# EAGLE board Pro_RF-Panel (EAGLE 9.2.0), part 1 of 3
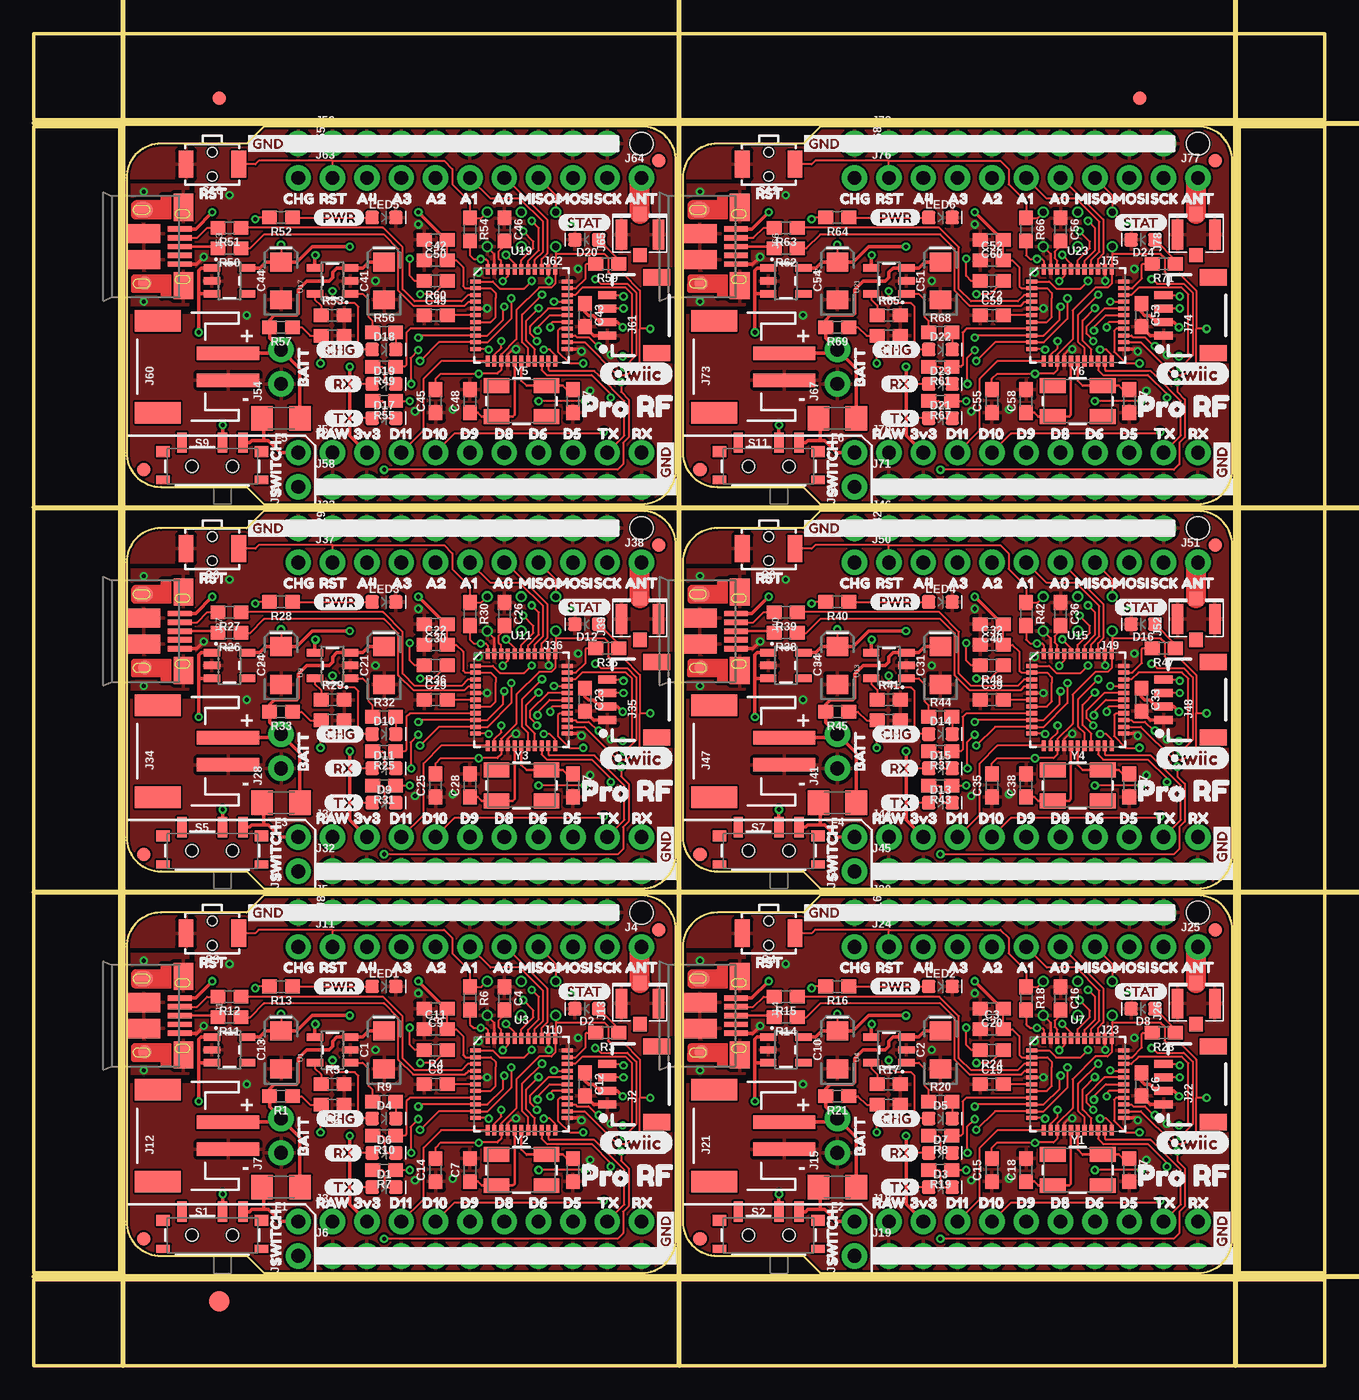
[diagram p0: board, top side]
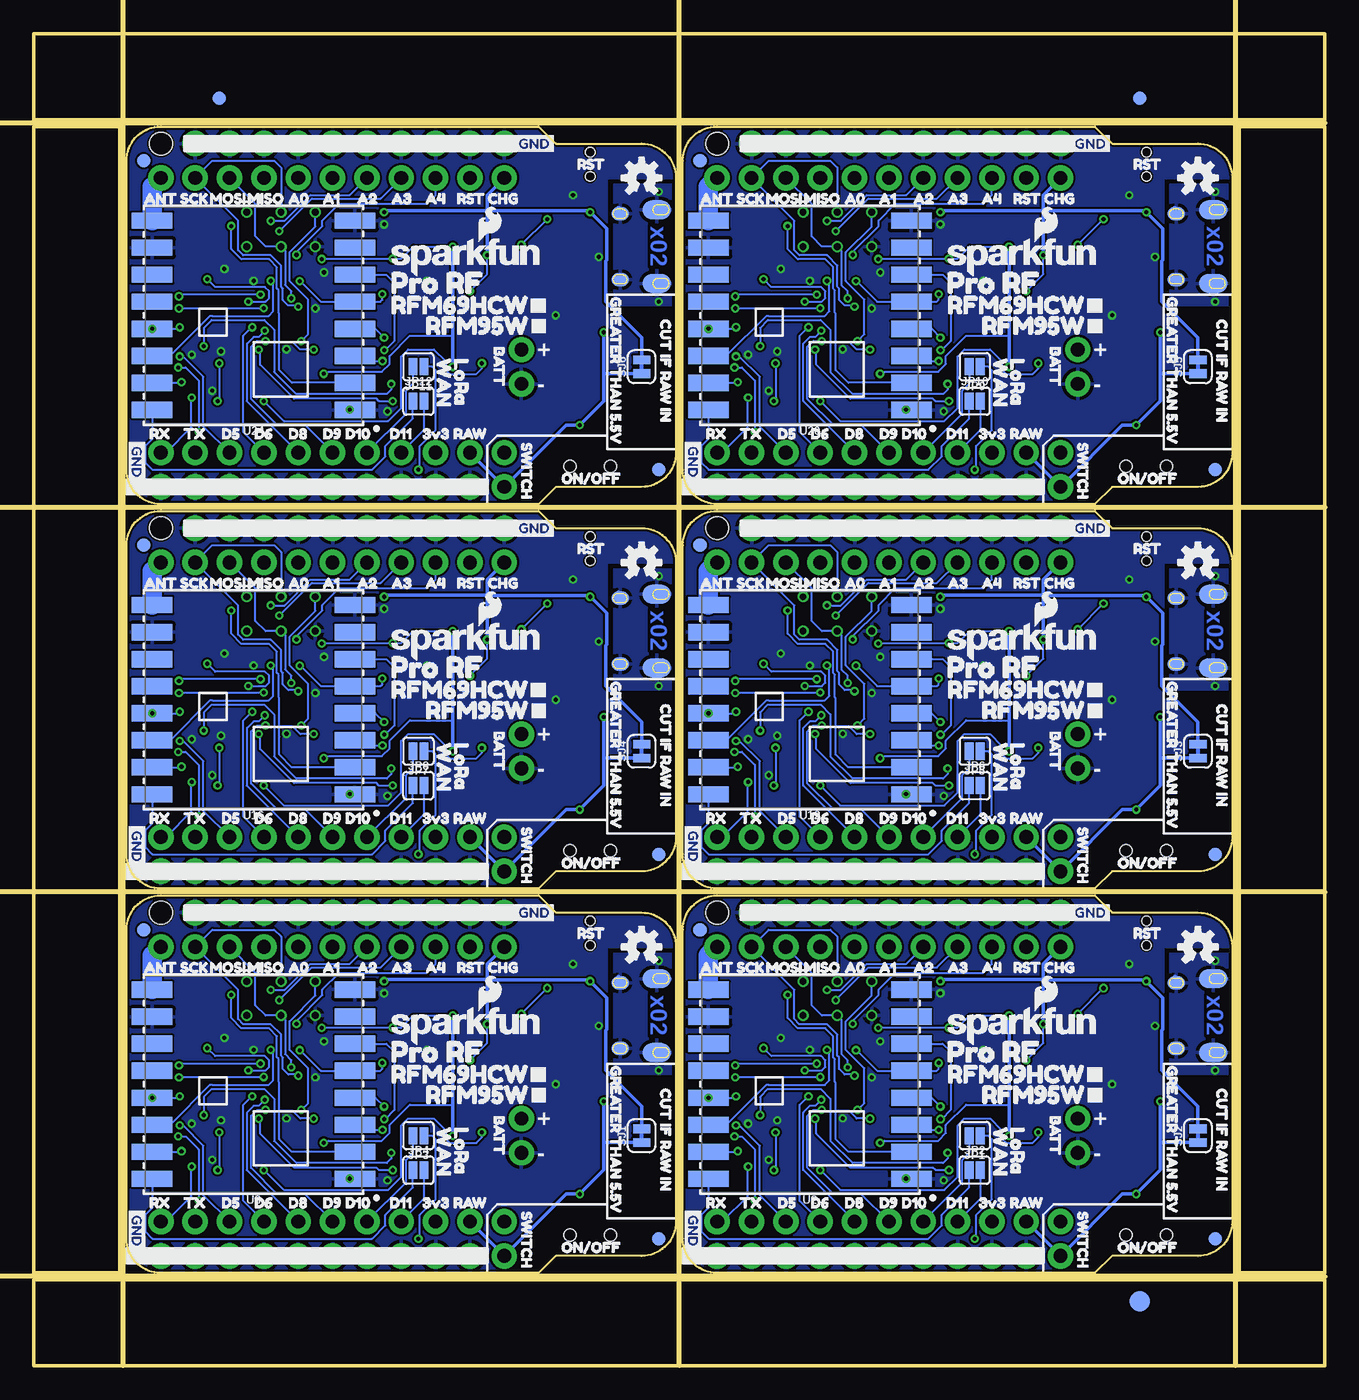
[diagram p1: board, bottom side, seen from below]

Size 95.5 x 98.55 mm. Coordinates in mm from the lower left corner, seen from the top.
Outline: 15.75,8.13 17.02,6.86 44.96,6.86 arc90 47.5,9.4 47.5,32.26 arc90 44.96,34.8 17.02,34.8 15.75,33.53 9.4,33.53 arc90 6.86,30.99 6.86,10.67 arc90 9.4,8.13 15.75,8.13
Outline: 56.9,8.13 58.17,6.86 86.11,6.86 arc90 88.65,9.4 88.65,32.26 arc90 86.11,34.8 58.17,34.8 56.9,33.53 50.55,33.53 arc90 48.01,30.99 48.01,10.67 arc90 50.55,8.13 56.9,8.13
Outline: 15.75,36.58 17.02,35.31 44.96,35.31 arc90 47.5,37.85 47.5,60.71 arc90 44.96,63.25 17.02,63.25 15.75,61.98 9.4,61.98 arc90 6.86,59.44 6.86,39.12 arc90 9.4,36.58 15.75,36.58
Outline: 56.9,36.58 58.17,35.31 86.11,35.31 arc90 88.65,37.85 88.65,60.71 arc90 86.11,63.25 58.17,63.25 56.9,61.98 50.55,61.98 arc90 48.01,59.44 48.01,39.12 arc90 50.55,36.58 56.9,36.58
Outline: 15.75,65.02 17.02,63.75 44.96,63.75 arc90 47.5,66.29 47.5,89.15 arc90 44.96,91.69 17.02,91.69 15.75,90.42 9.4,90.42 arc90 6.86,87.88 6.86,67.56 arc90 9.4,65.02 15.75,65.02
Outline: 56.9,65.02 58.17,63.75 86.11,63.75 arc90 88.65,66.29 88.65,89.15 arc90 86.11,91.69 58.17,91.69 56.9,90.42 50.55,90.42 arc90 48.01,87.88 48.01,67.56 arc90 50.55,65.02 56.9,65.02
Outline: 0,6.35 95.5,6.35 95.5,0 0,0 0,6.35
Outline: 89.15,91.69 95.5,91.69 95.5,6.86 89.15,6.86 89.15,91.69
Outline: 0,98.55 95.5,98.55 95.5,92.2 0,92.2 0,98.55
Outline: 0,91.69 6.35,91.69 6.35,6.86 0,6.86 0,91.69
Copper layers (1*16): Top 0.035mm / dielectric 1.5mm / Bottom 0.035mm
Design rules "SparkFun-2-layer-PCBWay-LIMIT": minimum track width 6mil, minimum drill 0.3mm, track to track 6mil, track to pad 6mil, pad to pad 6mil, via to via 6mil, smd to smd 6mil, copper to edge 6mil, drill to drill 6mil, minimum pad ring 6mil, minimum via ring 6mil, stop-mask expansion 4mil, vias tented up to drill 25mil, thermal gap 10mil
Holes 1.7 mm at 44.96,33.53 86.11,33.53 44.96,61.98 86.11,61.98 44.96,90.42 86.11,90.42
Milling: 7 lines

## Footprints (pad centres in the part's own frame; a part is rotated, then mirrored left to right if it is on the bottom)
EIA3216 = smd 1.4 x 1.6: + 1.4,0; - -1.4,0
0603 = smd 1.1 x 1: 1 -0.85,0; 2 0.85,0
LED-0603 = smd 1 x 1: A -0.877,0; C 0.877,0
FIDUCIAL-1X2 = smd 1 x 1: 1 0,0
FIDUCIAL-1.5X3 = smd 1.5 x 1.5: 1 0,0
1206 = smd 1.6 x 1.8: 1 -1.4,0; 2 1.4,0
USB-MICROB-PTH-MILL = smd 0.4 x 1.75: D+ 0,0; D- -0.65,0; GND 1.3,0; ID 0.65,0; VBUS -1.3,0 | smd 2 x 1.46: SHIELD -2.9,0.275; SHIELD2 2.9,0.275 | smd 1.425 x 2.5: SHIELD3 -0.963,-2.675; SHIELD4 0.963,-2.675 | smd 1.4 x 2.1 bottom: SHIELD5 -2.731,-2.531; SHIELD7 2.729,-2.531 | smd 1 x 1: SHIELD6 2.7,-2.575 | smd 1.1 x 1.5: SHIELD8 -2.731,-2.731 | smd 1 x 1.3 bottom: SHIELD9 -2.43,0.195; SHIELD10 2.43,0.195
1X04_1MM_RA = smd 0.6 x 1.35: 1 -1.5,0; 2 -0.5,0; 3 0.5,0; 4 1.5,0 | smd 1.2 x 2: NC1 2.8,-3.675; NC2 -2.8,-3.675
1X10_NO_SILK = drill 1.016 pad 1.88: 1 0,0; 2 2.54,0; 3 5.08,0; 4 7.62,0; 5 10.16,0; 6 12.7,0; 7 15.24,0; 8 17.78,0; 9 20.32,0; 10 22.86,0
1X01_NO_SILK = drill 1.016 pad 1.88: 1 0,0
1X09_NO_SILK = drill 1.016 pad 1.88: 1 0,0; 2 2.54,0; 3 5.08,0; 4 7.62,0; 5 10.16,0; 6 12.7,0; 7 15.24,0; 8 17.78,0; 9 20.32,0
1X02_NO_SILK = drill 1.016 pad 1.88: 1 0,0; 2 2.54,0
2X3_TEST_POINTS = drill 0.508: 1 -2.54,-1.27; 2 -2.54,1.27; 3 0,-1.27; 4 0,1.27; 5 2.54,-1.27; 6 2.54,1.27
JST-2-SMD = smd 1 x 4.6: 1 -1,-3.7; 2 1,-3.7 | smd 1.6 x 3.4: NC1 -3.4,1.5; NC2 3.4,1.5
U.FL = smd 2.2 x 0.85: 1 0,1.375; 2 0,-1.375 | smd 1.05 x 1: FEED 1.525,0; NC -1.525,0
SMT-JUMPER_2_NO_SILK = smd 0.635 x 1.27: 1 -0.406,0; 2 0.406,0
SWITCH_SPST_SMD_A = smd 0.7 x 1.5: 1 -2.25,-1.75; 2 -0.75,-1.75; 3 2.25,-1.75 | smd 1 x 0.6: GND1 -3.65,1; GND3 3.65,1 | smd 1 x 0.8: GND2 -3.65,-1.1; GND4 3.65,-1.1 | hole 0.9: -1.5,0; 1.5,0
TACTILE_SWITCH_SMD_RIGHT_ANGLE = smd 1.1 x 2: 1 -1.95,0; 2 1.95,0 | hole 0.7: 0,0.9; 0,-0.9
SMT-JUMPER_2_NC_TRACE_SILK = smd 0.635 x 1.27: 1 -0.508,0; 2 0.508,0
SOT23-5 = smd 0.55 x 1.2: 1 -0.95,-1.3; 2 0,-1.3; 3 0.95,-1.3; 4 0.95,1.3; 5 -0.95,1.3
RFM69HCW-XXXS2 = smd 3 x 1.2: 1 -7.5,7; 2 -7.5,5; 3 -7.5,3; 4 -7.5,1; 5 -7.5,-1; 6 -7.5,-3; 7 -7.5,-5; 8 -7.5,-7; 9 7.5,-7; 10 7.5,-5; 11 7.5,-3; 12 7.5,-1; 13 7.5,1; 14 7.5,3; 15 7.5,5; 16 7.5,7
QFN-44-NOPAD = smd 0.8 x 0.3: 1 -3.4,2.5; 2 -3.4,2; 3 -3.4,1.5; 4 -3.4,1; 5 -3.4,0.5; 6 -3.4,0; 7 -3.4,-0.5; 8 -3.4,-1; 9 -3.4,-1.5; 10 -3.4,-2; 11 -3.4,-2.5; 23 3.4,-2.5; 24 3.4,-2; 25 3.4,-1.5; 26 3.4,-1; 27 3.4,-0.5; 28 3.4,0; 29 3.4,0.5; 30 3.4,1; 31 3.4,1.5; 32 3.4,2; 33 3.4,2.5 | smd 0.3 x 0.8: 12 -2.5,-3.4; 13 -2,-3.4; 14 -1.5,-3.4; 15 -1,-3.4; 16 -0.5,-3.4; 17 0,-3.4; 18 0.5,-3.4; 19 1,-3.4; 20 1.5,-3.4; 21 2,-3.4; 22 2.5,-3.4; 34 2.5,3.4; 35 2,3.4; 36 1.5,3.4; 37 1,3.4; 38 0.5,3.4; 39 0,3.4; 40 -0.5,3.4; 41 -1,3.4; 42 -1.5,3.4; 43 -2,3.4; 44 -2.5,3.4
CRYSTAL-SMD-5X3.2-4PAD = smd 1.9 x 1.1: 1 -1.85,-1.15; 2 1.85,-1.15; 3 1.85,1.15; 4 -1.85,1.15

## Placement (x,y rotation side)
C1  10uF  [EIA3216]  25.91,23.37 90 top
C2  10uF  [EIA3216]  67.06,23.37 90 top
C3  0.1uF  [0603]  70.87,24.89 0 top
C4  0.1uF  [0603]  34.8,27.18 270 top
C5  22pF  [0603]  39.88,14.48 270 top
C6  1.0uF  [0603]  81.92,20.83 270 top
C7  22pF  [0603]  32.26,14.48 90 top
C8  1.0uF  [0603]  29.72,20.83 0 top
C9  4.7uF  [0603]  29.72,26.42 180 top
C10  10uF  [EIA3216]  59.44,23.37 90 top
C11  0.1uF  [0603]  29.72,24.89 0 top
C12  1.0uF  [0603]  40.77,20.83 270 top
C13  10uF  [EIA3216]  18.29,23.37 90 top
C14  0.1uF  [0603]  29.72,14.48 90 top
C15  0.1uF  [0603]  70.87,14.48 90 top
C16  0.1uF  [0603]  75.95,27.18 270 top
C17  22pF  [0603]  81.03,14.48 270 top
C18  22pF  [0603]  73.41,14.48 90 top
C19  1.0uF  [0603]  70.87,20.83 0 top
C20  4.7uF  [0603]  70.87,26.42 180 top
C21  10uF  [EIA3216]  25.91,51.82 90 top
C22  0.1uF  [0603]  29.72,53.34 0 top
C23  1.0uF  [0603]  40.77,49.28 270 top
C24  10uF  [EIA3216]  18.29,51.82 90 top
C25  0.1uF  [0603]  29.72,42.93 90 top
C26  0.1uF  [0603]  34.8,55.63 270 top
C27  22pF  [0603]  39.88,42.93 270 top
C28  22pF  [0603]  32.26,42.93 90 top
C29  1.0uF  [0603]  29.72,49.28 0 top
C30  4.7uF  [0603]  29.72,54.86 180 top
C31  10uF  [EIA3216]  67.06,51.82 90 top
C32  0.1uF  [0603]  70.87,53.34 0 top
C33  1.0uF  [0603]  81.92,49.28 270 top
C34  10uF  [EIA3216]  59.44,51.82 90 top
C35  0.1uF  [0603]  70.87,42.93 90 top
C36  0.1uF  [0603]  75.95,55.63 270 top
C37  22pF  [0603]  81.03,42.93 270 top
C38  22pF  [0603]  73.41,42.93 90 top
C39  1.0uF  [0603]  70.87,49.28 0 top
C40  4.7uF  [0603]  70.87,54.86 180 top
C41  10uF  [EIA3216]  25.91,80.26 90 top
C42  0.1uF  [0603]  29.72,81.79 0 top
C43  1.0uF  [0603]  40.77,77.72 270 top
C44  10uF  [EIA3216]  18.29,80.26 90 top
C45  0.1uF  [0603]  29.72,71.37 90 top
C46  0.1uF  [0603]  34.8,84.07 270 top
C47  22pF  [0603]  39.88,71.37 270 top
C48  22pF  [0603]  32.26,71.37 90 top
C49  1.0uF  [0603]  29.72,77.72 0 top
C50  4.7uF  [0603]  29.72,83.31 180 top
C51  10uF  [EIA3216]  67.06,80.26 90 top
C52  0.1uF  [0603]  70.87,81.79 0 top
C53  1.0uF  [0603]  81.92,77.72 270 top
C54  10uF  [EIA3216]  59.44,80.26 90 top
C55  0.1uF  [0603]  70.87,71.37 90 top
C56  0.1uF  [0603]  75.95,84.07 270 top
C57  22pF  [0603]  81.03,71.37 270 top
C58  22pF  [0603]  73.41,71.37 90 top
C59  1.0uF  [0603]  70.87,77.72 0 top
C60  4.7uF  [0603]  70.87,83.31 180 top
D1  Green  [LED-0603]  25.91,13.21 0 top
D2  BLUE  [LED-0603]  40.89,26.42 180 top
D3  Green  [LED-0603]  67.06,13.21 0 top
D4  Yellow  [LED-0603]  25.91,18.29 0 top
D5  Yellow  [LED-0603]  67.06,18.29 0 top
D6  Yellow  [LED-0603]  25.91,15.75 0 top
D7  Yellow  [LED-0603]  67.06,15.75 0 top
D8  BLUE  [LED-0603]  82.04,26.42 180 top
D9  Green  [LED-0603]  25.91,41.66 0 top
D10  Yellow  [LED-0603]  25.91,46.74 0 top
D11  Yellow  [LED-0603]  25.91,44.2 0 top
D12  BLUE  [LED-0603]  40.89,54.86 180 top
D13  Green  [LED-0603]  67.06,41.66 0 top
D14  Yellow  [LED-0603]  67.06,46.74 0 top
D15  Yellow  [LED-0603]  67.06,44.2 0 top
D16  BLUE  [LED-0603]  82.04,54.86 180 top
D17  Green  [LED-0603]  25.91,70.1 0 top
D18  Yellow  [LED-0603]  25.91,75.18 0 top
D19  Yellow  [LED-0603]  25.91,72.64 0 top
D20  BLUE  [LED-0603]  40.89,83.31 180 top
D21  Green  [LED-0603]  67.06,70.1 0 top
D22  Yellow  [LED-0603]  67.06,75.18 0 top
D23  Yellow  [LED-0603]  67.06,72.64 0 top
D24  BLUE  [LED-0603]  82.04,83.31 180 top
E$1  [FIDUCIAL-1X2]  13.72,93.79 0 top
E$2  [FIDUCIAL-1X2]  13.72,93.79 0 bottom
E$3  [FIDUCIAL-1X2]  81.79,93.79 0 top
E$4  [FIDUCIAL-1X2]  81.79,93.79 0 bottom
E$5  [FIDUCIAL-1.5X3]  13.72,4.76 0 top
E$6  [FIDUCIAL-1.5X3]  13.72,4.76 0 bottom
F1  6V/0.5A  [1206]  18.29,13.21 180 top
F2  6V/0.5A  [1206]  59.44,13.21 180 top
F3  6V/0.5A  [1206]  18.29,41.66 180 top
F4  6V/0.5A  [1206]  59.44,41.66 180 top
F5  6V/0.5A  [1206]  18.29,70.1 180 top
F6  6V/0.5A  [1206]  59.44,70.1 180 top
FD1  FIDUCIAL1X2  [FIDUCIAL-1X2]  8.13,9.4 0 bottom
FD2  FIDUCIAL1X2  [FIDUCIAL-1X2]  46.23,32.26 0 bottom
FD3  FIDUCIAL1X2  [FIDUCIAL-1X2]  8.13,9.4 0 top
FD4  FIDUCIAL1X2  [FIDUCIAL-1X2]  46.23,32.26 0 top
FD5  FIDUCIAL1X2  [FIDUCIAL-1X2]  49.28,9.4 0 bottom
FD6  FIDUCIAL1X2  [FIDUCIAL-1X2]  87.38,32.26 0 bottom
FD7  FIDUCIAL1X2  [FIDUCIAL-1X2]  49.28,9.4 0 top
FD8  FIDUCIAL1X2  [FIDUCIAL-1X2]  87.38,32.26 0 top
FD9  FIDUCIAL1X2  [FIDUCIAL-1X2]  8.13,37.85 0 bottom
FD10  FIDUCIAL1X2  [FIDUCIAL-1X2]  46.23,60.71 0 bottom
FD11  FIDUCIAL1X2  [FIDUCIAL-1X2]  8.13,37.85 0 top
FD12  FIDUCIAL1X2  [FIDUCIAL-1X2]  46.23,60.71 0 top
FD13  FIDUCIAL1X2  [FIDUCIAL-1X2]  49.28,37.85 0 bottom
FD14  FIDUCIAL1X2  [FIDUCIAL-1X2]  87.38,60.71 0 bottom
FD15  FIDUCIAL1X2  [FIDUCIAL-1X2]  49.28,37.85 0 top
FD16  FIDUCIAL1X2  [FIDUCIAL-1X2]  87.38,60.71 0 top
FD17  FIDUCIAL1X2  [FIDUCIAL-1X2]  8.13,66.29 0 bottom
FD18  FIDUCIAL1X2  [FIDUCIAL-1X2]  46.23,89.15 0 bottom
FD19  FIDUCIAL1X2  [FIDUCIAL-1X2]  8.13,66.29 0 top
FD20  FIDUCIAL1X2  [FIDUCIAL-1X2]  46.23,89.15 0 top
FD21  FIDUCIAL1X2  [FIDUCIAL-1X2]  49.28,66.29 0 bottom
FD22  FIDUCIAL1X2  [FIDUCIAL-1X2]  87.38,89.15 0 bottom
FD23  FIDUCIAL1X2  [FIDUCIAL-1X2]  49.28,66.29 0 top
FD24  FIDUCIAL1X2  [FIDUCIAL-1X2]  87.38,89.15 0 top
J1  [USB-MICROB-PTH-MILL]  10.79,25.91 270 top
J2  [1X04_1MM_RA]  42.42,20.83 90 top
J3  [1X10_NO_SILK]  22.1,10.67 0 top
J4  [1X01_NO_SILK]  44.96,30.99 0 top
J5  [1X09_NO_SILK]  22.1,33.53 0 top
J6  [1X10_NO_SILK]  22.1,8.13 0 top
J7  PTH  [1X02_NO_SILK]  18.29,15.75 90 top
J8  [1X02_NO_SILK]  19.56,33.53 270 top
J9  External On/Off  [1X02_NO_SILK]  19.56,8.13 90 top
J10  AVR_SPI_PROG_3X2TESTPOINTS  [2X3_TEST_POINTS]  36.07,27.18 180 top
J11  [1X09_NO_SILK]  22.1,30.99 0 top
J12  JST  [JST-2-SMD]  10.67,17.02 90 top
J13  U.FL  [U.FL]  44.83,26.8 90 top
J14  [USB-MICROB-PTH-MILL]  51.94,25.91 270 top
J15  PTH  [1X02_NO_SILK]  59.44,15.75 90 top
J16  [1X02_NO_SILK]  60.71,33.53 270 top
J17  External On/Off  [1X02_NO_SILK]  60.71,8.13 90 top
J18  [1X10_NO_SILK]  63.25,10.67 0 top
J19  [1X10_NO_SILK]  63.25,8.13 0 top
J20  [1X09_NO_SILK]  63.25,33.53 0 top
J21  JST  [JST-2-SMD]  51.82,17.02 90 top
J22  [1X04_1MM_RA]  83.57,20.83 90 top
J23  AVR_SPI_PROG_3X2TESTPOINTS  [2X3_TEST_POINTS]  77.22,27.18 180 top
J24  [1X09_NO_SILK]  63.25,30.99 0 top
J25  [1X01_NO_SILK]  86.11,30.99 0 top
J26  U.FL  [U.FL]  85.98,26.8 90 top
J27  [USB-MICROB-PTH-MILL]  10.79,54.36 270 top
J28  PTH  [1X02_NO_SILK]  18.29,44.2 90 top
J29  [1X02_NO_SILK]  19.56,61.98 270 top
J30  External On/Off  [1X02_NO_SILK]  19.56,36.58 90 top
J31  [1X10_NO_SILK]  22.1,39.12 0 top
J32  [1X10_NO_SILK]  22.1,36.58 0 top
J33  [1X09_NO_SILK]  22.1,61.98 0 top
J34  JST  [JST-2-SMD]  10.67,45.47 90 top
J35  [1X04_1MM_RA]  42.42,49.28 90 top
J36  AVR_SPI_PROG_3X2TESTPOINTS  [2X3_TEST_POINTS]  36.07,55.63 180 top
J37  [1X09_NO_SILK]  22.1,59.44 0 top
J38  [1X01_NO_SILK]  44.96,59.44 0 top
J39  U.FL  [U.FL]  44.83,55.24 90 top
J40  [USB-MICROB-PTH-MILL]  51.94,54.36 270 top
J41  PTH  [1X02_NO_SILK]  59.44,44.2 90 top
J42  [1X02_NO_SILK]  60.71,61.98 270 top
J43  External On/Off  [1X02_NO_SILK]  60.71,36.58 90 top
J44  [1X10_NO_SILK]  63.25,39.12 0 top
J45  [1X10_NO_SILK]  63.25,36.58 0 top
J46  [1X09_NO_SILK]  63.25,61.98 0 top
J47  JST  [JST-2-SMD]  51.82,45.47 90 top
J48  [1X04_1MM_RA]  83.57,49.28 90 top
J49  AVR_SPI_PROG_3X2TESTPOINTS  [2X3_TEST_POINTS]  77.22,55.63 180 top
J50  [1X09_NO_SILK]  63.25,59.44 0 top
J51  [1X01_NO_SILK]  86.11,59.44 0 top
J52  U.FL  [U.FL]  85.98,55.24 90 top
J53  [USB-MICROB-PTH-MILL]  10.79,82.8 270 top
J54  PTH  [1X02_NO_SILK]  18.29,72.64 90 top
J55  [1X02_NO_SILK]  19.56,90.42 270 top
J56  External On/Off  [1X02_NO_SILK]  19.56,65.02 90 top
J57  [1X10_NO_SILK]  22.1,67.56 0 top
J58  [1X10_NO_SILK]  22.1,65.02 0 top
J59  [1X09_NO_SILK]  22.1,90.42 0 top
J60  JST  [JST-2-SMD]  10.67,73.91 90 top
J61  [1X04_1MM_RA]  42.42,77.72 90 top
J62  AVR_SPI_PROG_3X2TESTPOINTS  [2X3_TEST_POINTS]  36.07,84.07 180 top
J63  [1X09_NO_SILK]  22.1,87.88 0 top
J64  [1X01_NO_SILK]  44.96,87.88 0 top
J65  U.FL  [U.FL]  44.83,83.69 90 top
J66  [USB-MICROB-PTH-MILL]  51.94,82.8 270 top
J67  PTH  [1X02_NO_SILK]  59.44,72.64 90 top
J68  [1X02_NO_SILK]  60.71,90.42 270 top
J69  External On/Off  [1X02_NO_SILK]  60.71,65.02 90 top
J70  [1X10_NO_SILK]  63.25,67.56 0 top
J71  [1X10_NO_SILK]  63.25,65.02 0 top
J72  [1X09_NO_SILK]  63.25,90.42 0 top
J73  JST  [JST-2-SMD]  51.82,73.91 90 top
J74  [1X04_1MM_RA]  83.57,77.72 90 top
J75  AVR_SPI_PROG_3X2TESTPOINTS  [2X3_TEST_POINTS]  77.22,84.07 180 top
J76  [1X09_NO_SILK]  63.25,87.88 0 top
J77  [1X01_NO_SILK]  86.11,87.88 0 top
J78  U.FL  [U.FL]  85.98,83.69 90 top
JP1  [SMT-JUMPER_2_NO_SILK]  25.91,17.02 180 bottom
JP2  [SMT-JUMPER_2_NO_SILK]  25.91,14.48 0 bottom
JP3  [SMT-JUMPER_2_NO_SILK]  67.06,17.02 180 bottom
JP4  [SMT-JUMPER_2_NO_SILK]  67.06,14.48 0 bottom
JP5  [SMT-JUMPER_2_NO_SILK]  25.91,45.47 180 bottom
JP6  [SMT-JUMPER_2_NO_SILK]  25.91,42.93 0 bottom
JP7  [SMT-JUMPER_2_NO_SILK]  67.06,45.47 180 bottom
JP8  [SMT-JUMPER_2_NO_SILK]  67.06,42.93 0 bottom
JP9  [SMT-JUMPER_2_NO_SILK]  25.91,73.91 180 bottom
JP10  [SMT-JUMPER_2_NO_SILK]  25.91,71.37 0 bottom
JP11  [SMT-JUMPER_2_NO_SILK]  67.06,73.91 180 bottom
JP12  [SMT-JUMPER_2_NO_SILK]  67.06,71.37 0 bottom
LED1  RED  [LED-0603]  25.91,28.07 0 top
LED2  RED  [LED-0603]  67.06,28.07 0 top
LED3  RED  [LED-0603]  25.91,56.51 0 top
LED4  RED  [LED-0603]  67.06,56.51 0 top
LED5  RED  [LED-0603]  25.91,84.96 0 top
LED6  RED  [LED-0603]  67.06,84.96 0 top
LOGO1  SFE_LOGO_NAME_FLAME.1_INCH  [SFE_LOGO_NAME_FLAME_.1]  69.47,23.62 0 bottom
LOGO2  SFE_LOGO_NAME_FLAME.1_INCH  [SFE_LOGO_NAME_FLAME_.1]  28.32,52.07 0 bottom
LOGO3  SFE_LOGO_NAME_FLAME.1_INCH  [SFE_LOGO_NAME_FLAME_.1]  28.32,23.62 0 bottom
LOGO4  SFE_LOGO_NAME_FLAME.1_INCH  [SFE_LOGO_NAME_FLAME_.1]  69.47,52.07 0 bottom
LOGO5  SFE_LOGO_NAME_FLAME.1_INCH  [SFE_LOGO_NAME_FLAME_.1]  28.32,80.52 0 bottom
LOGO6  SFE_LOGO_NAME_FLAME.1_INCH  [SFE_LOGO_NAME_FLAME_.1]  69.47,80.52 0 bottom
R1  10k  [0603]  18.29,19.94 180 top
R2  10k  [0603]  22.1,19.3 180 top
R3  1k  [0603]  42.42,24.64 180 top
R4  10k  [0603]  29.72,23.37 180 top
R5  2.0k  [0603]  22.1,20.83 0 top
R6  10k  [0603]  32.26,27.18 270 top
R7  1k  [0603]  25.91,14.48 180 top
R8  1k  [0603]  67.06,17.02 180 top
R9  1k  [0603]  25.91,19.56 0 top
R10  1k  [0603]  25.91,17.02 180 top
R11  22  [0603]  14.48,25.78 180 top
R12  22  [0603]  14.48,27.3 180 top
R13  1k  [0603]  18.29,28.07 180 top
R14  22  [0603]  55.63,25.78 180 top
R15  22  [0603]  55.63,27.3 180 top
R16  1k  [0603]  59.44,28.07 180 top
R17  2.0k  [0603]  63.25,20.83 0 top
R18  10k  [0603]  73.41,27.18 270 top
R19  1k  [0603]  67.06,14.48 180 top
R20  1k  [0603]  67.06,19.56 0 top
R21  10k  [0603]  59.44,19.94 180 top
R22  10k  [0603]  63.25,19.3 180 top
R23  1k  [0603]  83.57,24.64 180 top
R24  10k  [0603]  70.87,23.37 180 top
R25  1k  [0603]  25.91,45.47 180 top
R26  22  [0603]  14.48,54.23 180 top
R27  22  [0603]  14.48,55.75 180 top
R28  1k  [0603]  18.29,56.51 180 top
R29  2.0k  [0603]  22.1,49.28 0 top
R30  10k  [0603]  32.26,55.63 270 top
R31  1k  [0603]  25.91,42.93 180 top
R32  1k  [0603]  25.91,48.01 0 top
R33  10k  [0603]  18.29,48.39 180 top
R34  10k  [0603]  22.1,47.75 180 top
R35  1k  [0603]  42.42,53.09 180 top
R36  10k  [0603]  29.72,51.82 180 top
R37  1k  [0603]  67.06,45.47 180 top
R38  22  [0603]  55.63,54.23 180 top
R39  22  [0603]  55.63,55.75 180 top
R40  1k  [0603]  59.44,56.51 180 top
R41  2.0k  [0603]  63.25,49.28 0 top
R42  10k  [0603]  73.41,55.63 270 top
R43  1k  [0603]  67.06,42.93 180 top
R44  1k  [0603]  67.06,48.01 0 top
R45  10k  [0603]  59.44,48.39 180 top
R46  10k  [0603]  63.25,47.75 180 top
R47  1k  [0603]  83.57,53.09 180 top
R48  10k  [0603]  70.87,51.82 180 top
R49  1k  [0603]  25.91,73.91 180 top
R50  22  [0603]  14.48,82.68 180 top
R51  22  [0603]  14.48,84.2 180 top
R52  1k  [0603]  18.29,84.96 180 top
R53  2.0k  [0603]  22.1,77.72 0 top
R54  10k  [0603]  32.26,84.07 270 top
R55  1k  [0603]  25.91,71.37 180 top
R56  1k  [0603]  25.91,76.45 0 top
R57  10k  [0603]  18.29,76.84 180 top
R58  10k  [0603]  22.1,76.2 180 top
R59  1k  [0603]  42.42,81.53 180 top
R60  10k  [0603]  29.72,80.26 180 top
R61  1k  [0603]  67.06,73.91 180 top
R62  22  [0603]  55.63,82.68 180 top
R63  22  [0603]  55.63,84.2 180 top
R64  1k  [0603]  59.44,84.96 180 top
R65  2.0k  [0603]  63.25,77.72 0 top
R66  10k  [0603]  73.41,84.07 270 top
R67  1k  [0603]  67.06,71.37 180 top
R68  1k  [0603]  67.06,76.45 0 top
R69  10k  [0603]  59.44,76.84 180 top
R70  10k  [0603]  63.25,76.2 180 top
R71  1k  [0603]  83.57,81.53 180 top
R72  10k  [0603]  70.87,80.26 180 top
S1  Power  [SWITCH_SPST_SMD_A]  13.21,9.65 180 top
S2  Power  [SWITCH_SPST_SMD_A]  54.36,9.65 180 top
S3  [TACTILE_SWITCH_SMD_RIGHT_ANGLE]  13.21,32 180 top
S4  [TACTILE_SWITCH_SMD_RIGHT_ANGLE]  54.36,32 180 top
S5  Power  [SWITCH_SPST_SMD_A]  13.21,38.1 180 top
S6  [TACTILE_SWITCH_SMD_RIGHT_ANGLE]  13.21,60.45 180 top
S7  Power  [SWITCH_SPST_SMD_A]  54.36,38.1 180 top
S8  [TACTILE_SWITCH_SMD_RIGHT_ANGLE]  54.36,60.45 180 top
S9  Power  [SWITCH_SPST_SMD_A]  13.21,66.55 180 top
S10  [TACTILE_SWITCH_SMD_RIGHT_ANGLE]  13.21,88.9 180 top
S11  Power  [SWITCH_SPST_SMD_A]  54.36,66.55 180 top
S12  [TACTILE_SWITCH_SMD_RIGHT_ANGLE]  54.36,88.9 180 top
SJ1  USB Power  [SMT-JUMPER_2_NC_TRACE_SILK]  50.55,17.02 90 bottom
SJ2  USB Power  [SMT-JUMPER_2_NC_TRACE_SILK]  9.4,17.02 90 bottom
SJ3  USB Power  [SMT-JUMPER_2_NC_TRACE_SILK]  9.4,45.47 90 bottom
SJ4  USB Power  [SMT-JUMPER_2_NC_TRACE_SILK]  50.55,45.47 90 bottom
SJ5  USB Power  [SMT-JUMPER_2_NC_TRACE_SILK]  9.4,73.91 90 bottom
SJ6  USB Power  [SMT-JUMPER_2_NC_TRACE_SILK]  50.55,73.91 90 bottom
U1  MCP73831  [SOT23-5]  22.1,23.37 90 top
U2  915MHz  [RFM69HCW-XXXS2]  38.1,20.83 180 bottom
U3  32U4  [QFN-44-NOPAD]  36.07,20.83 0 top
U4  MCP73831  [SOT23-5]  63.25,23.37 90 top
U5  3.3V  [SOT23-5]  55.63,23.37 270 top
U6  3.3V  [SOT23-5]  14.48,23.37 270 top
U7  32U4  [QFN-44-NOPAD]  77.22,20.83 0 top
U8  915MHz  [RFM69HCW-XXXS2]  79.25,20.83 180 bottom
U9  MCP73831  [SOT23-5]  22.1,51.82 90 top
U10  3.3V  [SOT23-5]  14.48,51.82 270 top
U11  32U4  [QFN-44-NOPAD]  36.07,49.28 0 top
U12  915MHz  [RFM69HCW-XXXS2]  38.1,49.28 180 bottom
U13  MCP73831  [SOT23-5]  63.25,51.82 90 top
U14  3.3V  [SOT23-5]  55.63,51.82 270 top
U15  32U4  [QFN-44-NOPAD]  77.22,49.28 0 top
U16  915MHz  [RFM69HCW-XXXS2]  79.25,49.28 180 bottom
U17  MCP73831  [SOT23-5]  22.1,80.26 90 top
U18  3.3V  [SOT23-5]  14.48,80.26 270 top
U19  32U4  [QFN-44-NOPAD]  36.07,77.72 0 top
U20  915MHz  [RFM69HCW-XXXS2]  38.1,77.72 180 bottom
U21  MCP73831  [SOT23-5]  63.25,80.26 90 top
U22  3.3V  [SOT23-5]  55.63,80.26 270 top
U23  32U4  [QFN-44-NOPAD]  77.22,77.72 0 top
U24  915MHz  [RFM69HCW-XXXS2]  79.25,77.72 180 bottom
U$1  [PRO_RF0]  39.12,14.1 0 top
U$2  [PRO_RF0]  80.26,14.1 0 top
U$3  [A43]  23.24,29.46 0 top
U$4  [A34]  25.78,29.46 0 top
U$5  [A25]  28.32,29.46 0 top
U$6  [A16]  30.86,29.46 0 top
U$7  [A07]  33.27,29.46 0 top
U$8  [MISO8]  35.18,29.46 0 top
U$9  [MOSI9]  37.97,29.46 0 top
U$10  [SCK10]  40.77,29.46 0 top
U$11  [ANT11]  43.05,29.46 0 top
U$12  [GND0]  15.49,33.53 0 top
U$13  [RST2]  20.45,29.46 0 top
U$14  [CHG1]  17.78,29.46 0 top
U$15  [D90]  30.86,12.06 0 top
U$16  [D90]  33.66,12.06 0 bottom
U$17  [GND0]  46.74,11.81 270 bottom
U$18  [D615]  35.94,12.06 0 top
U$19  [RX2]  46.48,12.06 0 bottom
U$20  [D817]  33.4,12.06 0 top
U$21  [D100]  32,12.06 0 bottom
U$22  [D1119]  25.65,12.06 0 top
U$23  [3V320]  22.99,12.06 0 top
U$24  [RAW21]  20.19,12.06 0 top
U$25  [LORA0]  22.73,18.54 270 bottom
U$26  [A43]  64.39,29.46 0 top
U$27  [SWITCH23]  17.91,6.73 90 top
U$28  [RST2]  11.56,29.84 0 top
U$29  [BATT25]  19.94,14.86 90 top
U$30  [A34]  66.93,29.46 0 top
U$31  [PRO_RF0]  29.34,23.24 0 bottom
U$32  [BATT25]  19.94,19.18 270 bottom
U$33  [CUT_IF_RAW_IN0]  7.62,21.21 270 bottom
U$34  [GREATER_THAN_5#5V1]  11.3,22.86 270 bottom
U$35  [WAN1]  24,18.54 270 bottom
U$36  [RST2]  14.86,32 0 bottom
U$37  [SWITCH23]  17.91,12.06 270 bottom
U$38  [GND0]  19.18,33.53 0 bottom
U$39  [ON#OFF0]  16,8.76 0 bottom
U$40  [CHG1]  21.46,29.46 0 bottom
U$41  [RST2]  23.75,29.46 0 bottom
U$42  [A43]  26.04,29.46 0 bottom
U$43  [A34]  28.57,29.46 0 bottom
U$44  [A25]  31.12,29.46 0 bottom
U$45  [A16]  33.66,29.46 0 bottom
U$46  [A07]  36.2,29.46 0 bottom
U$47  [MISO8]  39.24,29.46 0 bottom
U$48  [MOSI9]  42.04,29.46 0 bottom
U$49  [SCK10]  44.2,29.46 0 bottom
U$50  [ANT11]  46.86,29.46 0 bottom
U$51  [OSHW-LOGO-S]  9.4,30.99 0 bottom
U$52  [RAW21]  24,12.06 0 bottom
U$53  [3V320]  26.29,12.06 0 bottom
U$54  [D1119]  28.7,12.06 0 bottom
U$55  [D514]  38.48,12.06 0 top
U$56  [D817]  36.2,12.06 0 bottom
U$57  [TX3]  43.94,12.06 0 bottom
U$58  [D615]  38.73,12.06 0 bottom
U$59  [RFM69HCW#1]  29.08,21.59 0 bottom
U$60  [RFM95W#0]  26.54,20.07 0 bottom
U$61  [A25]  69.47,29.46 0 top
U$62  [GND0]  46.74,8.13 90 top
U$63  [PWR-()-03]  20.7,28.07 0 top
U$64  [A16]  72.01,29.46 0 top
U$65  [CHG1]  20.83,18.29 0 top
U$66  [QWIIC-()-04]  41.78,16.51 0 top
U$67  [A07]  74.42,29.46 0 top
U$68  [D100]  28.07,12.06 0 top
U$69  [TX3]  41.02,12.06 0 top
U$70  [TX6]  21.46,13.21 0 top
U$71  [STAT5]  38.73,27.69 0 top
U$72  [RX7]  21.46,15.75 0 top
U$73  [RX2]  43.56,12.06 0 top
U$74  [D514]  41.15,12.06 0 bottom
U$75  [MISO8]  76.33,29.46 0 top
U$76  [MOSI9]  79.12,29.46 0 top
U$77  [SCK10]  81.92,29.46 0 top
U$78  [ANT11]  84.2,29.46 0 top
U$79  [GND0]  56.64,33.53 0 top
U$80  [RST2]  61.59,29.46 0 top
U$81  [CHG1]  58.93,29.46 0 top
U$82  [D615]  77.09,12.06 0 top
U$83  [D817]  74.55,12.06 0 top
U$84  [D1119]  66.8,12.06 0 top
U$85  [3V320]  64.14,12.06 0 top
U$86  [RAW21]  61.34,12.06 0 top
U$87  [SWITCH23]  59.05,6.73 90 top
U$88  [RST2]  52.7,29.84 0 top
U$89  [BATT25]  61.09,14.86 90 top
U$90  [PRO_RF0]  70.48,23.24 0 bottom
U$91  [BATT25]  61.09,19.18 270 bottom
U$92  [CUT_IF_RAW_IN0]  48.77,21.21 270 bottom
U$93  [GREATER_THAN_5#5V1]  52.45,22.86 270 bottom
U$94  [RST2]  56.01,32 0 bottom
U$95  [SWITCH23]  59.05,12.06 270 bottom
U$96  [GND0]  60.32,33.53 0 bottom
U$97  [ON#OFF0]  57.15,8.76 0 bottom
U$98  [CHG1]  62.61,29.46 0 bottom
U$99  [RST2]  64.9,29.46 0 bottom
U$100  [A43]  67.18,29.46 0 bottom
U$101  [A34]  69.72,29.46 0 bottom
U$102  [A25]  72.26,29.46 0 bottom
U$103  [A16]  74.8,29.46 0 bottom
U$104  [A07]  77.34,29.46 0 bottom
U$105  [MISO8]  80.39,29.46 0 bottom
U$106  [MOSI9]  83.19,29.46 0 bottom
U$107  [SCK10]  85.34,29.46 0 bottom
U$108  [ANT11]  88.01,29.46 0 bottom
U$109  [OSHW-LOGO-S]  50.55,30.99 0 bottom
U$110  [RAW21]  65.15,12.06 0 bottom
U$111  [3V320]  67.44,12.06 0 bottom
U$112  [D1119]  69.85,12.06 0 bottom
U$113  [D817]  77.34,12.06 0 bottom
U$114  [D615]  79.88,12.06 0 bottom
U$115  [GND0]  87.88,8.13 90 top
U$116  [PWR-()-03]  61.85,28.07 0 top
U$117  [QWIIC-()-04]  82.93,16.51 0 top
U$118  [TX3]  82.17,12.06 0 top
U$119  [TX6]  62.61,13.21 0 top
U$120  [STAT5]  79.88,27.69 0 top
U$121  [RX7]  62.61,15.75 0 top
U$122  [RX2]  84.71,12.06 0 top
U$123  [CHG1]  61.98,18.29 0 top
U$124  [D100]  69.22,12.06 0 top
U$125  [D100]  73.15,12.06 0 bottom
U$126  [D514]  79.63,12.06 0 top
U$127  [D514]  82.3,12.06 0 bottom
U$128  [D90]  72.01,12.06 0 top
U$129  [D90]  74.8,12.06 0 bottom
U$130  [GND0]  87.88,11.81 270 bottom
U$131  [RX2]  87.63,12.06 0 bottom
U$132  [TX3]  85.09,12.06 0 bottom
U$133  [RFM69HCW#1]  70.23,21.59 0 bottom
U$134  [RFM95W#0]  67.69,20.07 0 bottom
U$135  [LORA0]  63.88,18.54 270 bottom
U$136  [WAN1]  65.15,18.54 270 bottom
U$137  [PRO_RF0]  39.12,42.54 0 top
U$138  [A43]  23.24,57.91 0 top
U$139  [A34]  25.78,57.91 0 top
U$140  [A25]  28.32,57.91 0 top
U$141  [A16]  30.86,57.91 0 top
U$142  [A07]  33.27,57.91 0 top
U$143  [MISO8]  35.18,57.91 0 top
U$144  [MOSI9]  37.97,57.91 0 top
U$145  [SCK10]  40.77,57.91 0 top
U$146  [ANT11]  43.05,57.91 0 top
U$147  [GND0]  15.49,61.98 0 top
U$148  [RST2]  20.45,57.91 0 top
U$149  [CHG1]  17.78,57.91 0 top
U$150  [D615]  35.94,40.51 0 top
U$151  [D817]  33.4,40.51 0 top
U$152  [D1119]  25.65,40.51 0 top
U$153  [3V320]  22.99,40.51 0 top
U$154  [RAW21]  20.19,40.51 0 top
U$155  [SWITCH23]  17.91,35.18 90 top
U$156  [RST2]  11.56,58.29 0 top
U$157  [BATT25]  19.94,43.31 90 top
U$158  [PRO_RF0]  29.34,51.69 0 bottom
U$159  [BATT25]  19.94,47.62 270 bottom
U$160  [CUT_IF_RAW_IN0]  7.62,49.66 270 bottom
U$161  [GREATER_THAN_5#5V1]  11.3,51.31 270 bottom
U$162  [RST2]  14.86,60.45 0 bottom
U$163  [SWITCH23]  17.91,40.51 270 bottom
U$164  [GND0]  19.18,61.98 0 bottom
U$165  [ON#OFF0]  16,37.21 0 bottom
U$166  [CHG1]  21.46,57.91 0 bottom
U$167  [RST2]  23.75,57.91 0 bottom
U$168  [A43]  26.04,57.91 0 bottom
U$169  [A34]  28.57,57.91 0 bottom
U$170  [A25]  31.12,57.91 0 bottom
U$171  [A16]  33.66,57.91 0 bottom
U$172  [A07]  36.2,57.91 0 bottom
U$173  [MISO8]  39.24,57.91 0 bottom
U$174  [MOSI9]  42.04,57.91 0 bottom
U$175  [SCK10]  44.2,57.91 0 bottom
U$176  [ANT11]  46.86,57.91 0 bottom
U$177  [OSHW-LOGO-S]  9.4,59.44 0 bottom
U$178  [RAW21]  24,40.51 0 bottom
U$179  [3V320]  26.29,40.51 0 bottom
U$180  [D1119]  28.7,40.51 0 bottom
U$181  [D817]  36.2,40.51 0 bottom
U$182  [D615]  38.73,40.51 0 bottom
U$183  [GND0]  46.74,36.58 90 top
U$184  [PWR-()-03]  20.7,56.51 0 top
U$185  [QWIIC-()-04]  41.78,44.96 0 top
U$186  [TX3]  41.02,40.51 0 top
U$187  [TX6]  21.46,41.66 0 top
U$188  [STAT5]  38.73,56.13 0 top
U$189  [RX7]  21.46,44.2 0 top
U$190  [RX2]  43.56,40.51 0 top
U$191  [CHG1]  20.83,46.74 0 top
U$192  [D100]  28.07,40.51 0 top
U$193  [D100]  32,40.51 0 bottom
U$194  [D514]  38.48,40.51 0 top
U$195  [D514]  41.15,40.51 0 bottom
U$196  [D90]  30.86,40.51 0 top
U$197  [D90]  33.66,40.51 0 bottom
U$198  [GND0]  46.74,40.26 270 bottom
U$199  [RX2]  46.48,40.51 0 bottom
U$200  [TX3]  43.94,40.51 0 bottom
U$201  [RFM69HCW#1]  29.08,50.04 0 bottom
U$202  [RFM95W#0]  26.54,48.51 0 bottom
U$203  [LORA0]  22.73,46.99 270 bottom
U$204  [WAN1]  24,46.99 270 bottom
U$205  [PRO_RF0]  80.26,42.54 0 top
U$206  [A43]  64.39,57.91 0 top
U$207  [A34]  66.93,57.91 0 top
U$208  [A25]  69.47,57.91 0 top
U$209  [A16]  72.01,57.91 0 top
U$210  [A07]  74.42,57.91 0 top
U$211  [MISO8]  76.33,57.91 0 top
U$212  [MOSI9]  79.12,57.91 0 top
U$213  [SCK10]  81.92,57.91 0 top
U$214  [ANT11]  84.2,57.91 0 top
U$215  [GND0]  56.64,61.98 0 top
U$216  [RST2]  61.59,57.91 0 top
U$217  [CHG1]  58.93,57.91 0 top
U$218  [D615]  77.09,40.51 0 top
U$219  [D817]  74.55,40.51 0 top
U$220  [D1119]  66.8,40.51 0 top
U$221  [3V320]  64.14,40.51 0 top
U$222  [RAW21]  61.34,40.51 0 top
U$223  [SWITCH23]  59.05,35.18 90 top
U$224  [RST2]  52.7,58.29 0 top
U$225  [BATT25]  61.09,43.31 90 top
U$226  [PRO_RF0]  70.48,51.69 0 bottom
U$227  [BATT25]  61.09,47.62 270 bottom
U$228  [CUT_IF_RAW_IN0]  48.77,49.66 270 bottom
U$229  [GREATER_THAN_5#5V1]  52.45,51.31 270 bottom
U$230  [RST2]  56.01,60.45 0 bottom
U$231  [SWITCH23]  59.05,40.51 270 bottom
U$232  [GND0]  60.32,61.98 0 bottom
U$233  [ON#OFF0]  57.15,37.21 0 bottom
U$234  [CHG1]  62.61,57.91 0 bottom
U$235  [RST2]  64.9,57.91 0 bottom
U$236  [A43]  67.18,57.91 0 bottom
U$237  [A34]  69.72,57.91 0 bottom
U$238  [A25]  72.26,57.91 0 bottom
U$239  [A16]  74.8,57.91 0 bottom
U$240  [A07]  77.34,57.91 0 bottom
U$241  [MISO8]  80.39,57.91 0 bottom
U$242  [MOSI9]  83.19,57.91 0 bottom
U$243  [SCK10]  85.34,57.91 0 bottom
U$244  [ANT11]  88.01,57.91 0 bottom
U$245  [OSHW-LOGO-S]  50.55,59.44 0 bottom
U$246  [RAW21]  65.15,40.51 0 bottom
U$247  [3V320]  67.44,40.51 0 bottom
U$248  [D1119]  69.85,40.51 0 bottom
U$249  [D817]  77.34,40.51 0 bottom
U$250  [D615]  79.88,40.51 0 bottom
U$251  [GND0]  87.88,36.58 90 top
U$252  [PWR-()-03]  61.85,56.51 0 top
U$253  [QWIIC-()-04]  82.93,44.96 0 top
U$254  [TX3]  82.17,40.51 0 top
U$255  [TX6]  62.61,41.66 0 top
U$256  [STAT5]  79.88,56.13 0 top
U$257  [RX7]  62.61,44.2 0 top
U$258  [RX2]  84.71,40.51 0 top
U$259  [CHG1]  61.98,46.74 0 top
U$260  [D100]  69.22,40.51 0 top
U$261  [D100]  73.15,40.51 0 bottom
U$262  [D514]  79.63,40.51 0 top
U$263  [D514]  82.3,40.51 0 bottom
U$264  [D90]  72.01,40.51 0 top
U$265  [D90]  74.8,40.51 0 bottom
U$266  [GND0]  87.88,40.26 270 bottom
U$267  [RX2]  87.63,40.51 0 bottom
U$268  [TX3]  85.09,40.51 0 bottom
U$269  [RFM69HCW#1]  70.23,50.04 0 bottom
U$270  [RFM95W#0]  67.69,48.51 0 bottom
U$271  [LORA0]  63.88,46.99 270 bottom
U$272  [WAN1]  65.15,46.99 270 bottom
U$273  [PRO_RF0]  39.12,70.99 0 top
U$274  [A43]  23.24,86.36 0 top
U$275  [A34]  25.78,86.36 0 top
U$276  [A25]  28.32,86.36 0 top
U$277  [A16]  30.86,86.36 0 top
U$278  [A07]  33.27,86.36 0 top
U$279  [MISO8]  35.18,86.36 0 top
U$280  [MOSI9]  37.97,86.36 0 top
U$281  [SCK10]  40.77,86.36 0 top
U$282  [ANT11]  43.05,86.36 0 top
U$283  [GND0]  15.49,90.42 0 top
U$284  [RST2]  20.45,86.36 0 top
U$285  [CHG1]  17.78,86.36 0 top
U$286  [D615]  35.94,68.96 0 top
U$287  [D817]  33.4,68.96 0 top
U$288  [D1119]  25.65,68.96 0 top
U$289  [3V320]  22.99,68.96 0 top
U$290  [RAW21]  20.19,68.96 0 top
U$291  [SWITCH23]  17.91,63.63 90 top
U$292  [RST2]  11.56,86.74 0 top
U$293  [BATT25]  19.94,71.76 90 top
U$294  [PRO_RF0]  29.34,80.14 0 bottom
U$295  [BATT25]  19.94,76.07 270 bottom
U$296  [CUT_IF_RAW_IN0]  7.62,78.11 270 bottom
U$297  [GREATER_THAN_5#5V1]  11.3,79.76 270 bottom
U$298  [RST2]  14.86,88.9 0 bottom
U$299  [SWITCH23]  17.91,68.96 270 bottom
U$300  [GND0]  19.18,90.42 0 bottom
U$301  [ON#OFF0]  16,65.66 0 bottom
U$302  [CHG1]  21.46,86.36 0 bottom
U$303  [RST2]  23.75,86.36 0 bottom
U$304  [A43]  26.04,86.36 0 bottom
U$305  [A34]  28.57,86.36 0 bottom
U$306  [A25]  31.12,86.36 0 bottom
U$307  [A16]  33.66,86.36 0 bottom
U$308  [A07]  36.2,86.36 0 bottom
U$309  [MISO8]  39.24,86.36 0 bottom
U$310  [MOSI9]  42.04,86.36 0 bottom
U$311  [SCK10]  44.2,86.36 0 bottom
U$312  [ANT11]  46.86,86.36 0 bottom
U$313  [OSHW-LOGO-S]  9.4,87.88 0 bottom
U$314  [RAW21]  24,68.96 0 bottom
U$315  [3V320]  26.29,68.96 0 bottom
U$316  [D1119]  28.7,68.96 0 bottom
U$317  [D817]  36.2,68.96 0 bottom
U$318  [D615]  38.73,68.96 0 bottom
U$319  [GND0]  46.74,65.02 90 top
U$320  [PWR-()-03]  20.7,84.96 0 top
U$321  [QWIIC-()-04]  41.78,73.41 0 top
U$322  [TX3]  41.02,68.96 0 top
U$323  [TX6]  21.46,70.1 0 top
U$324  [STAT5]  38.73,84.58 0 top
U$325  [RX7]  21.46,72.64 0 top
U$326  [RX2]  43.56,68.96 0 top
U$327  [CHG1]  20.83,75.18 0 top
U$328  [D100]  28.07,68.96 0 top
U$329  [D100]  32,68.96 0 bottom
U$330  [D514]  38.48,68.96 0 top
U$331  [D514]  41.15,68.96 0 bottom
U$332  [D90]  30.86,68.96 0 top
U$333  [D90]  33.66,68.96 0 bottom
U$334  [GND0]  46.74,68.71 270 bottom
U$335  [RX2]  46.48,68.96 0 bottom
U$336  [TX3]  43.94,68.96 0 bottom
U$337  [RFM69HCW#1]  29.08,78.49 0 bottom
U$338  [RFM95W#0]  26.54,76.96 0 bottom
U$339  [LORA0]  22.73,75.44 270 bottom
U$340  [WAN1]  24,75.44 270 bottom
U$341  [PRO_RF0]  80.26,70.99 0 top
U$342  [A43]  64.39,86.36 0 top
U$343  [A34]  66.93,86.36 0 top
U$344  [A25]  69.47,86.36 0 top
U$345  [A16]  72.01,86.36 0 top
U$346  [A07]  74.42,86.36 0 top
U$347  [MISO8]  76.33,86.36 0 top
U$348  [MOSI9]  79.12,86.36 0 top
U$349  [SCK10]  81.92,86.36 0 top
U$350  [ANT11]  84.2,86.36 0 top
U$351  [GND0]  56.64,90.42 0 top
U$352  [RST2]  61.59,86.36 0 top
U$353  [CHG1]  58.93,86.36 0 top
U$354  [D615]  77.09,68.96 0 top
U$355  [D817]  74.55,68.96 0 top
U$356  [D1119]  66.8,68.96 0 top
U$357  [3V320]  64.14,68.96 0 top
U$358  [RAW21]  61.34,68.96 0 top
U$359  [SWITCH23]  59.05,63.63 90 top
U$360  [RST2]  52.7,86.74 0 top
U$361  [BATT25]  61.09,71.76 90 top
U$362  [PRO_RF0]  70.48,80.14 0 bottom
U$363  [BATT25]  61.09,76.07 270 bottom
U$364  [CUT_IF_RAW_IN0]  48.77,78.11 270 bottom
U$365  [GREATER_THAN_5#5V1]  52.45,79.76 270 bottom
U$366  [RST2]  56.01,88.9 0 bottom
U$367  [SWITCH23]  59.05,68.96 270 bottom
U$368  [GND0]  60.32,90.42 0 bottom
U$369  [ON#OFF0]  57.15,65.66 0 bottom
U$370  [CHG1]  62.61,86.36 0 bottom
U$371  [RST2]  64.9,86.36 0 bottom
U$372  [A43]  67.18,86.36 0 bottom
U$373  [A34]  69.72,86.36 0 bottom
U$374  [A25]  72.26,86.36 0 bottom
U$375  [A16]  74.8,86.36 0 bottom
U$376  [A07]  77.34,86.36 0 bottom
U$377  [MISO8]  80.39,86.36 0 bottom
U$378  [MOSI9]  83.19,86.36 0 bottom
U$379  [SCK10]  85.34,86.36 0 bottom
U$380  [ANT11]  88.01,86.36 0 bottom
U$381  [OSHW-LOGO-S]  50.55,87.88 0 bottom
U$382  [RAW21]  65.15,68.96 0 bottom
U$383  [3V320]  67.44,68.96 0 bottom
U$384  [D1119]  69.85,68.96 0 bottom
U$385  [D817]  77.34,68.96 0 bottom
U$386  [D615]  79.88,68.96 0 bottom
U$387  [GND0]  87.88,65.02 90 top
U$388  [PWR-()-03]  61.85,84.96 0 top
U$389  [QWIIC-()-04]  82.93,73.41 0 top
U$390  [TX3]  82.17,68.96 0 top
U$391  [TX6]  62.61,70.1 0 top
U$392  [STAT5]  79.88,84.58 0 top
U$393  [RX7]  62.61,72.64 0 top
U$394  [RX2]  84.71,68.96 0 top
U$395  [CHG1]  61.98,75.18 0 top
U$396  [D100]  69.22,68.96 0 top
U$397  [D100]  73.15,68.96 0 bottom
U$398  [D514]  79.63,68.96 0 top
U$399  [D514]  82.3,68.96 0 bottom
U$400  [D90]  72.01,68.96 0 top
U$401  [D90]  74.8,68.96 0 bottom
U$402  [GND0]  87.88,68.71 270 bottom
U$403  [RX2]  87.63,68.96 0 bottom
U$404  [TX3]  85.09,68.96 0 bottom
U$405  [RFM69HCW#1]  70.23,78.49 0 bottom
U$406  [RFM95W#0]  67.69,76.96 0 bottom
U$407  [LORA0]  63.88,75.44 270 bottom
U$408  [WAN1]  65.15,75.44 270 bottom
Y1  8MHz  [CRYSTAL-SMD-5X3.2-4PAD]  77.22,14.48 0 top
Y2  8MHz  [CRYSTAL-SMD-5X3.2-4PAD]  36.07,14.48 0 top
Y3  8MHz  [CRYSTAL-SMD-5X3.2-4PAD]  36.07,42.93 0 top
Y4  8MHz  [CRYSTAL-SMD-5X3.2-4PAD]  77.22,42.93 0 top
Y5  8MHz  [CRYSTAL-SMD-5X3.2-4PAD]  36.07,71.37 0 top
Y6  8MHz  [CRYSTAL-SMD-5X3.2-4PAD]  77.22,71.37 0 top

## Library data of the parts
C1 C2 C10 C13 C21 C24 C31 C34 C41 C44 C51 C54 = SparkFun-Capacitors; PROD_ID: CAP-00811
C3 C4 C11 C14-C16 C22 C25 C26 C32 C35 C36 C42 C45 C46 C52 C55 C56 = SparkFun-Capacitors; PROD_ID: CAP-00810
C5 C7 C17 C18 C27 C28 C37 C38 C47 C48 C57 C58 = SparkFun-Capacitors; PROD_ID: CAP-07876
C6 C8 C12 C19 C23 C29 C33 C39 C43 C49 C53 C59 = SparkFun-Capacitors; PROD_ID: CAP-00868
C9 C20 C30 C40 C50 C60 = SparkFun-Capacitors; PROD_ID: CAP-08280
D1 D3 D9 D13 D17 D21 = SparkFun-LED; PROD_ID: DIO-00821
D2 D8 D12 D16 D20 D24 = SparkFun-LED; PROD_ID: DIO-08575
D4-D7 D10 D11 D14 D15 D18 D19 D22 D23 = SparkFun-LED; PROD_ID: DIO-09003
E$1-E$4 FD1-FD24 LOGO1-LOGO6 U$51 U$109 U$177 U$245 U$313 U$381 = SparkFun-Aesthetics
E$5 E$6 = SparkFun-Retired
F1-F6 = SparkFun-Fuses; PROD_ID: RES-08585
J1 J14 J27 J40 J53 J66 = SparkFun-Connectors; PROD_ID: CONN-13711
J2 J22 J35 J48 J61 J74 = SparkFun-Connectors; PROD_ID: CONN-13694
J3 J6 J18 J19 J31 J32 J44 J45 J57 J58 J70 J71 = SparkFun-Connectors; PROD_ID: CONN-11563
J4 J5 J7-J11 J15-J17 J20 J23-J25 J28-J30 J33 J36-J38 J41-J43 J46 J49-J51 J54-J56 J59 J62-J64 J67-J69 J72 J75-J77 = SparkFun-Connectors
J12 J21 J34 J47 J60 J73 = SparkFun-Connectors; PROD_ID: CONN-11443
J13 J26 J39 J52 J65 J78 = SparkFun-Connectors; PROD_ID: CONN-09193; SF_ID: WRL-09144
JP1-JP12 SJ1-SJ6 = SparkFun-Jumpers
LED1-LED6 = SparkFun-LED; PROD_ID: DIO-00819
R1 R2 R4 R6 R18 R21 R22 R24 R30 R33 R34 R36 R42 R45 R46 R48 R54 R57 R58 R60 R66 R69 R70 R72 = SparkFun-Resistors; PROD_ID: RES-00824
R3 R7-R10 R13 R16 R19 R20 R23 R25 R28 R31 R32 R35 R37 R40 R43 R44 R47 R49 R52 R55 R56 R59 R61 R64 R67 R68 R71 = SparkFun-Resistors; PROD_ID: RES-07856
R5 R17 R29 R41 R53 R65 = SparkFun-Resistors; PROD_ID: RES-08296
R11 R12 R14 R15 R26 R27 R38 R39 R50 R51 R62 R63 = SparkFun-Resistors; PROD_ID: RES-08698
S1 S2 S5 S7 S9 S11 = SparkFun-Switches; PROD_ID: SWCH-10651; SF_SKU: COM-10860
S3 S4 S6 S8 S10 S12 = SparkFun-Switches; PROD_ID: COMP-12265
U1 U4 U9 U13 U17 U21 = SparkFun-IC-Power; PROD_ID: IC-09995
U2 U8 U12 U16 U20 U24 = SparkFun-RF; PROD_ID: IC-11997
U3 U7 U11 U15 U19 U23 = SparkFun-IC-Microcontroller; PROD_ID: IC-10828
U5 U6 U10 U14 U18 U22 = SparkFun-IC-Power; PROD_ID: VREG-12457
U$1 U$2 U$31 U$90 U$137 U$158 U$205 U$226 U$273 U$294 U$341 U$362 = buzzard_labels (24)
U$3-U$14 U$17 U$18 U$20 U$22-U$24 U$26-U$30 U$32 U$36-U$38 U$40-U$50 U$52-U$56 U$58 U$61 U$62 U$64 U$67 U$74-U$89 U$91 U$94-U$96 U$98-U$108 U$110-U$115 U$126 U$127 U$130 U$138-U$157 U$159 U$162-U$164 U$166-U$176 U$178-U$183 U$194 U$195 U$198 U$206-U$225 U$227 U$230-U$232 U$234-U$244 U$246-U$251 U$262 U$263 U$266 U$274-U$293 U$295 U$298-U$300 U$302-U$312 U$314-U$319 U$330 U$331 U$334 U$342-U$361 U$363 U$366-U$368 U$370-U$380 U$382-U$387 U$398 U$399 U$402 = buzzard_labels (25)
U$15 U$16 U$128 U$129 U$196 U$197 U$264 U$265 U$332 U$333 U$400 U$401 = buzzard_labels (10)
U$19 U$57 U$69-U$73 U$118-U$122 U$131 U$132 U$186-U$190 U$199 U$200 U$254-U$258 U$267 U$268 U$322-U$326 U$335 U$336 U$390-U$394 U$403 U$404 = buzzard_labels (8)
U$21 U$65 U$68 U$123-U$125 U$191-U$193 U$259-U$261 U$327-U$329 U$395-U$397 = buzzard_labels (9)
U$25 U$35 U$135 U$136 U$203 U$204 U$271 U$272 U$339 U$340 U$407 U$408 = buzzard_labels (3)
U$33 U$34 U$92 U$93 U$160 U$161 U$228 U$229 U$296 U$297 U$364 U$365 = buzzard_labels (27)
U$39 U$97 U$165 U$233 U$301 U$369 = buzzard_labels (28)
U$59 U$60 U$133 U$134 U$201 U$202 U$269 U$270 U$337 U$338 U$405 U$406 = buzzard_labels (12)
U$63 U$66 U$116 U$117 U$184 U$185 U$252 U$253 U$320 U$321 U$388 U$389 = Labels
Y1-Y6 = SparkFun-Clocks; PROD_ID: XTAL-09431

## Nets
3.3V [vcc]: C12.1 C13.+ C14.2 D1.A D6.A J2.2 J3.2 J10.2 R4.2 R6.2 R13.2 U2.13 U3.14 U3.24 U3.34 U3.44 U6.5
3.3V1 [vcc]: C6.1 C10.+ C15.2 D3.A D7.A J18.2 J22.2 J23.2 R16.2 R18.2 R24.2 U5.5 U7.14 U7.24 U7.34 U7.44 U8.13
3.3V2 [vcc]: C23.1 C24.+ C25.2 D9.A D11.A J31.2 J35.2 J36.2 R28.2 R30.2 R36.2 U10.5 U11.14 U11.24 U11.34 U11.44 U12.13
3.3V3 [vcc]: C33.1 C34.+ C35.2 D13.A D15.A J44.2 J48.2 J49.2 R40.2 R42.2 R48.2 U14.5 U15.14 U15.24 U15.34 U15.44 U16.13
3.3V4 [vcc]: C43.1 C44.+ C45.2 D17.A D19.A J57.2 J61.2 J62.2 R52.2 R54.2 R60.2 U18.5 U19.14 U19.24 U19.34 U19.44 U20.13
3.3V5 [vcc]: C53.1 C54.+ C55.2 D21.A D23.A J70.2 J74.2 J75.2 R64.2 R66.2 R72.2 U22.5 U23.14 U23.24 U23.34 U23.44 U24.13
!CS: R4.1 U2.5 U3.41
!CS1: R24.1 U7.41 U8.5
!CS2: R36.1 U11.41 U12.5
!CS3: R48.1 U15.41 U16.5
!CS4: R60.1 U19.41 U20.5
!CS5: R72.1 U23.41 U24.5
!RST: J10.5 J11.1 R6.1 S3.1 U3.13
!RST1: J23.5 J24.1 R18.1 S4.1 U7.13
!RST2: J36.5 J37.1 R30.1 S6.1 U11.13
!RST3: J49.5 J50.1 R42.1 S8.1 U15.13
!RST4: J62.5 J63.1 R54.1 S10.1 U19.13
!RST5: J75.5 J76.1 R66.1 S12.1 U23.13
A0: J11.6 U3.36
A1: J11.5 U3.37
A2: J11.4 U3.38
A3: J11.3 U3.39
A4: J11.2 U3.40
A5: J24.6 U7.36
A6: J24.5 U7.37
A7: J24.4 U7.38
A8: J24.3 U7.39
A9: J24.2 U7.40
A10: J37.6 U11.36
A11: J37.5 U11.37
A12: J37.4 U11.38
A13: J37.3 U11.39
A14: J37.2 U11.40
A15: J50.6 U15.36
A16: J50.5 U15.37
A17: J50.4 U15.38
A18: J50.3 U15.39
A19: J50.2 U15.40
A20: J63.6 U19.36
A21: J63.5 U19.37
A22: J63.4 U19.38
A23: J63.3 U19.39
A24: J63.2 U19.40
A25: J76.6 U23.36
A26: J76.5 U23.37
A27: J76.4 U23.38
A28: J76.3 U23.39
A29: J76.2 U23.40
ANT: J4.1 J13.FEED U2.9
ANT1: J25.1 J26.FEED U8.9
ANT2: J38.1 J39.FEED U12.9
ANT3: J51.1 J52.FEED U16.9
ANT4: J64.1 J65.FEED U20.9
ANT5: J77.1 J78.FEED U24.9
AREF: C4.2 U3.42
AREF1: C16.2 U7.42
AREF2: C26.2 U11.42
AREF3: C36.2 U15.42
AREF4: C46.2 U19.42
AREF5: C56.2 U23.42
CHARGE_STAT: R9.1 U1.1
CHARGE_STAT1: R20.1 U4.1
CHARGE_STAT2: R32.1 U9.1
CHARGE_STAT3: R44.1 U13.1
CHARGE_STAT4: R56.1 U17.1
CHARGE_STAT5: R68.1 U21.1
D1: J18.8 U7.31
D2: J18.7 U7.27
D3: J18.6 U7.28
D4: J18.4 JP3.2 U7.30
D5: J3.8 U3.31
D6: J3.7 U3.27
D7: J18.5 U7.29
D8: J3.6 U3.28
D9: J3.5 U3.29
D10: J3.4 JP1.2 U3.30
D11: J3.3 JP2.2 U3.12
D12: J18.3 JP4.2 U7.12
D13: J31.8 U11.31
D14: J31.7 U11.27
D15: J31.6 U11.28
D16: J31.4 JP5.2 U11.30
D17: J31.5 U11.29
D18: J31.3 JP6.2 U11.12
D19: J44.8 U15.31
D20: J44.7 U15.27
D21: J44.6 U15.28
D22: J44.4 JP7.2 U15.30
D23: J44.5 U15.29
D24: J44.3 JP8.2 U15.12
D25: J57.8 U19.31
D26: J57.7 U19.27
D27: J57.6 U19.28
D28: J57.4 JP9.2 U19.30
D29: J57.5 U19.29
D30: J57.3 JP10.2 U19.12
D31: J70.8 U23.31
D32: J70.7 U23.27
D33: J70.6 U23.28
D34: J70.4 JP11.2 U23.30
D35: J70.5 U23.29
D36: J70.3 JP12.2 U23.12
D+: R11.1 U3.4
D+1: R14.1 U7.4
D+2: R26.1 U11.4
D+3: R38.1 U15.4
D+4: R50.1 U19.4
D+5: R62.1 U23.4
D-: R12.1 U3.3
D-1: R15.1 U7.3
D-2: R27.1 U11.3
D-3: R39.1 U15.3
D-4: R51.1 U19.3
D-5: R63.1 U23.3
GND: C1.- C4.1 C5.2 C7.2 C8.1 C9.2 C11.1 C12.2 C13.- C14.1 D2.C J1.GND J2.1 J5.1 J5.2 J5.3 J5.4 J5.5 J5.6 J5.7 J5.8 J5.9 J6.1 J6.2 J6.3 J6.4 J6.5 J6.6 J6.7 J6.8 J6.9 J6.10 J7.1 J8.1 J10.6 J12.1 J13.1 J13.2 LED1.C R2.1 R5.2 S3.2 U1.2 U2.1 U2.8 U2.10 U3.5 U3.15 U3.23 U3.33 U3.35 U3.43 U6.2
GND1: C2.- C3.1 C6.2 C10.- C15.1 C16.1 C17.2 C18.2 C19.1 C20.2 D8.C J14.GND J15.1 J16.1 J19.1 J19.2 J19.3 J19.4 J19.5 J19.6 J19.7 J19.8 J19.9 J19.10 J20.1 J20.2 J20.3 J20.4 J20.5 J20.6 J20.7 J20.8 J20.9 J21.1 J22.1 J23.6 J26.1 J26.2 LED2.C R17.2 R22.1 S4.2 U4.2 U5.2 U7.5 U7.15 U7.23 U7.33 U7.35 U7.43 U8.1 U8.8 U8.10
GND2: C21.- C22.1 C23.2 C24.- C25.1 C26.1 C27.2 C28.2 C29.1 C30.2 D12.C J27.GND J28.1 J29.1 J32.1 J32.2 J32.3 J32.4 J32.5 J32.6 J32.7 J32.8 J32.9 J32.10 J33.1 J33.2 J33.3 J33.4 J33.5 J33.6 J33.7 J33.8 J33.9 J34.1 J35.1 J36.6 J39.1 J39.2 LED3.C R29.2 R34.1 S6.2 U9.2 U10.2 U11.5 U11.15 U11.23 U11.33 U11.35 U11.43 U12.1 U12.8 U12.10
GND3: C31.- C32.1 C33.2 C34.- C35.1 C36.1 C37.2 C38.2 C39.1 C40.2 D16.C J40.GND J41.1 J42.1 J45.1 J45.2 J45.3 J45.4 J45.5 J45.6 J45.7 J45.8 J45.9 J45.10 J46.1 J46.2 J46.3 J46.4 J46.5 J46.6 J46.7 J46.8 J46.9 J47.1 J48.1 J49.6 J52.1 J52.2 LED4.C R41.2 R46.1 S8.2 U13.2 U14.2 U15.5 U15.15 U15.23 U15.33 U15.35 U15.43 U16.1 U16.8 U16.10
GND4: C41.- C42.1 C43.2 C44.- C45.1 C46.1 C47.2 C48.2 C49.1 C50.2 D20.C J53.GND J54.1 J55.1 J58.1 J58.2 J58.3 J58.4 J58.5 J58.6 J58.7 J58.8 J58.9 J58.10 J59.1 J59.2 J59.3 J59.4 J59.5 J59.6 J59.7 J59.8 J59.9 J60.1 J61.1 J62.6 J65.1 J65.2 LED5.C R53.2 R58.1 S10.2 U17.2 U18.2 U19.5 U19.15 U19.23 U19.33 U19.35 U19.43 U20.1 U20.8 U20.10
GND5: C51.- C52.1 C53.2 C54.- C55.1 C56.1 C57.2 C58.2 C59.1 C60.2 D24.C J66.GND J67.1 J68.1 J71.1 J71.2 J71.3 J71.4 J71.5 J71.6 J71.7 J71.8 J71.9 J71.10 J72.1 J72.2 J72.3 J72.4 J72.5 J72.6 J72.7 J72.8 J72.9 J73.1 J74.1 J75.6 J78.1 J78.2 LED6.C R65.2 R70.1 S12.2 U21.2 U22.2 U23.5 U23.15 U23.23 U23.33 U23.35 U23.43 U24.1 U24.8 U24.10
MISO: J10.1 J11.7 U2.2 U3.11
MISO1: J23.1 J24.7 U7.11 U8.2
MISO2: J36.1 J37.7 U11.11 U12.2
MISO3: J49.1 J50.7 U15.11 U16.2
MISO4: J62.1 J63.7 U19.11 U20.2
MISO5: J75.1 J76.7 U23.11 U24.2
MOSI: J10.4 J11.8 U2.3 U3.10
MOSI1: J23.4 J24.8 U7.10 U8.3
MOSI2: J36.4 J37.8 U11.10 U12.3
MOSI3: J49.4 J50.8 U15.10 U16.3
MOSI4: J62.4 J63.8 U19.10 U20.3
MOSI5: J75.4 J76.8 U23.10 U24.3
N$1: D6.C R10.2
N$2: D1.C R7.2
N$3: D2.A R3.1
N$4: C5.1 U3.17 Y2.3
N$5: J1.D+ R11.2
N$6: C7.1 U3.16 Y2.1
N$7: J14.D- R15.2
N$8: D4.C R9.2
N$9: F1.2 J9.2 S1.1
N$10: J14.D+ R14.2
N$11: R5.1 U1.5
N$12: F2.2 J17.2 S2.1
N$13: R17.1 U4.5
N$14: D5.C R20.2
N$15: LED2.A R16.1
N$16: D7.C R8.2
N$17: D3.C R19.2
N$18: D8.A R23.1
N$19: C17.1 U7.17 Y1.3
N$20: J1.D- R12.2
N$21: C18.1 U7.16 Y1.1
N$22: J27.D- R27.2
N$23: J27.D+ R26.2
N$24: F3.2 J30.2 S5.1
N$25: R29.1 U9.5
N$26: D10.C R32.2
N$27: LED3.A R28.1
N$28: D11.C R25.2
N$29: D9.C R31.2
N$30: D12.A R35.1
N$31: C27.1 U11.17 Y3.3
N$32: C28.1 U11.16 Y3.1
N$33: J40.D- R39.2
N$34: J40.D+ R38.2
N$35: F4.2 J43.2 S7.1
N$36: R41.1 U13.5
N$37: D14.C R44.2
N$38: LED1.A R13.1
N$39: LED4.A R40.1
N$40: D15.C R37.2
N$41: D13.C R43.2
N$42: D16.A R47.1
N$43: C37.1 U15.17 Y4.3
N$44: C38.1 U15.16 Y4.1
N$45: J53.D- R51.2
N$46: J53.D+ R50.2
N$47: F5.2 J56.2 S9.1
N$48: R53.1 U17.5
N$49: D18.C R56.2
N$50: LED5.A R52.1
N$51: D19.C R49.2
N$52: D17.C R55.2
N$53: D20.A R59.1
N$54: C47.1 U19.17 Y5.3
N$55: C48.1 U19.16 Y5.1
N$56: J66.D- R63.2
N$57: J66.D+ R62.2
N$58: F6.2 J69.2 S11.1
N$59: R65.1 U21.5
N$60: D22.C R68.2
N$61: LED6.A R64.1
N$62: D23.C R61.2
N$63: D21.C R67.2
N$64: D24.A R71.1
N$65: C57.1 U23.17 Y6.3
N$66: C58.1 U23.16 Y6.1
RAW [vcc]: J3.1 J9.1 S1.2 SJ2.1 U6.1 U6.3
RAW1 [vcc]: J17.1 J18.1 S2.2 SJ1.1 U5.1 U5.3
RAW2 [vcc]: J30.1 J31.1 S5.2 SJ3.1 U10.1 U10.3
RAW3 [vcc]: J43.1 J44.1 S7.2 SJ4.1 U14.1 U14.3
RAW4 [vcc]: J56.1 J57.1 S9.2 SJ5.1 U18.1 U18.3
RAW5 [vcc]: J69.1 J70.1 S11.2 SJ6.1 U22.1 U22.3
RFM_INT: U2.14 U3.1
RFM_INT1: U7.1 U8.14
RFM_INT2: U11.1 U12.14
RFM_INT3: U15.1 U16.14
RFM_INT4: U19.1 U20.14
RFM_INT5: U23.1 U24.14
RFM_IO1: JP1.1 U2.15
RFM_IO2: JP2.1 U2.16
RFM_IO3: JP3.1 U8.15
RFM_IO4: JP4.1 U8.16
RFM_IO5: JP5.1 U12.15
RFM_IO6: JP6.1 U12.16
RFM_IO7: JP7.1 U16.15
RFM_IO8: JP8.1 U16.16
RFM_IO9: JP9.1 U20.15
RFM_IO10: JP10.1 U20.16
RFM_IO11: JP11.1 U24.15
RFM_IO12: JP12.1 U24.16
RFM_RST: U2.6 U3.25
RFM_RST1: U7.25 U8.6
RFM_RST2: U11.25 U12.6
RFM_RST3: U15.25 U16.6
RFM_RST4: U19.25 U20.6
RFM_RST5: U23.25 U24.6
RXI: J3.10 U3.20
RXI1: J18.10 U7.20
RXI2: J31.10 U11.20
RXI3: J44.10 U15.20
RXI4: J57.10 U19.20
RXI5: J70.10 U23.20
RXLED: R10.1 U3.8
RXLED1: R8.1 U7.8
RXLED2: R25.1 U11.8
RXLED3: R37.1 U15.8
RXLED4: R49.1 U19.8
RXLED5: R61.1 U23.8
SCK: J10.3 J11.9 U2.4 U3.9
SCK1: J23.3 J24.9 U7.9 U8.4
SCK2: J36.3 J37.9 U11.9 U12.4
SCK3: J49.3 J50.9 U15.9 U16.4
SCK4: J62.3 J63.9 U19.9 U20.4
SCK5: J75.3 J76.9 U23.9 U24.4
SCL: J2.4 U3.18
SCL1: J22.4 U7.18
SCL2: J35.4 U11.18
SCL3: J48.4 U15.18
SCL4: J61.4 U19.18
SCL5: J74.4 U23.18
SDA: J2.3 U3.19
SDA1: J22.3 U7.19
SDA2: J35.3 U11.19
SDA3: J48.3 U15.19
SDA4: J61.3 U19.19
SDA5: J74.3 U23.19
SHLD: J1.SHIELD J1.SHIELD2 J1.SHIELD3 J1.SHIELD4 J1.SHIELD5 J1.SHIELD6 J1.SHIELD7 J1.SHIELD8 J1.SHIELD9 J1.SHIELD10
SHLD1: J14.SHIELD J14.SHIELD2 J14.SHIELD3 J14.SHIELD4 J14.SHIELD5 J14.SHIELD6 J14.SHIELD7 J14.SHIELD8 J14.SHIELD9 J14.SHIELD10
SHLD2: J27.SHIELD J27.SHIELD2 J27.SHIELD3 J27.SHIELD4 J27.SHIELD5 J27.SHIELD6 J27.SHIELD7 J27.SHIELD8 J27.SHIELD9 J27.SHIELD10
SHLD3: J40.SHIELD J40.SHIELD2 J40.SHIELD3 J40.SHIELD4 J40.SHIELD5 J40.SHIELD6 J40.SHIELD7 J40.SHIELD8 J40.SHIELD9 J40.SHIELD10
SHLD4: J53.SHIELD J53.SHIELD2 J53.SHIELD3 J53.SHIELD4 J53.SHIELD5 J53.SHIELD6 J53.SHIELD7 J53.SHIELD8 J53.SHIELD9 J53.SHIELD10
SHLD5: J66.SHIELD J66.SHIELD2 J66.SHIELD3 J66.SHIELD4 J66.SHIELD5 J66.SHIELD6 J66.SHIELD7 J66.SHIELD8 J66.SHIELD9 J66.SHIELD10
STAT: R3.2 U3.32
STAT1: R23.2 U7.32
STAT2: R35.2 U11.32
STAT3: R47.2 U15.32
STAT4: R59.2 U19.32
STAT5: R71.2 U23.32
TXLED: R7.1 U3.22
TXLED1: R19.1 U7.22
TXLED2: R31.1 U11.22
TXLED3: R43.1 U15.22
TXLED4: R55.1 U19.22
TXLED5: R67.1 U23.22
TXO: J3.9 U3.21
TXO1: J18.9 U7.21
TXO2: J31.9 U11.21
TXO3: J44.9 U15.21
TXO4: J57.9 U19.21
TXO5: J70.9 U23.21
UCAP: C8.2 U3.6
UCAP1: C19.2 U7.6
UCAP2: C29.2 U11.6
UCAP3: C39.2 U15.6
UCAP4: C49.2 U19.6
UCAP5: C59.2 U23.6
USB_VCC: C9.1 C11.2 D4.A J1.VBUS J8.2 SJ2.2 U1.4 U3.2 U3.7
USB_VCC1: C3.2 C20.1 D5.A J14.VBUS J16.2 SJ1.2 U4.4 U7.2 U7.7
USB_VCC2: C22.2 C30.1 D10.A J27.VBUS J29.2 SJ3.2 U9.4 U11.2 U11.7
USB_VCC3: C32.2 C40.1 D14.A J40.VBUS J42.2 SJ4.2 U13.4 U15.2 U15.7
USB_VCC4: C42.2 C50.1 D18.A J53.VBUS J55.2 SJ5.2 U17.4 U19.2 U19.7
USB_VCC5: C52.2 C60.1 D22.A J66.VBUS J68.2 SJ6.2 U21.4 U23.2 U23.7
VBATT: C1.+ F1.1 J7.2 J12.2 R1.2 U1.3
VBATT1: C2.+ F2.1 J15.2 J21.2 R21.2 U4.3
VBATT2: C21.+ F3.1 J28.2 J34.2 R33.2 U9.3
VBATT3: C31.+ F4.1 J41.2 J47.2 R45.2 U13.3
VBATT4: C41.+ F5.1 J54.2 J60.2 R57.2 U17.3
VBATT5: C51.+ F6.1 J67.2 J73.2 R69.2 U21.3
VBATT_LVL: R1.1 R2.2 U3.26
VBATT_LVL1: R21.1 R22.2 U7.26
VBATT_LVL2: R33.1 R34.2 U11.26
VBATT_LVL3: R45.1 R46.2 U15.26
VBATT_LVL4: R57.1 R58.2 U19.26
VBATT_LVL5: R69.1 R70.2 U23.26

## Tracks (layer width: path | path; a pad name or v marks a point on that pad's centre or on a via)
3.3V  (via drill 0.3)
  Top 0.152: C14.2 29.72,16.13 30.1,16.51 32.92,16.51 | U3.24 40.73,18.83 43.15,16.41 43.69,16.41 43.91,16.41 44.83,17.33 44.83,19.81 | D6.A 23.37,15.75 | D1.A 23.37,13.21 | 32.92,16.51 34.29,16.51 34.57,16.79 U3.14 34.57,17.93 35.69,19.05 35.69,21.2 37.37,22.89 38.28,22.89 38.57,23.17 U3.34 38.57,24.95 38.61,24.99 38.61,25.27 38.61,25.37 | 32.92,16.51 v32.91,16.5 | U3.44 33.57,24.86 33.43,24.99 v33.05,24.99 32.54,24.99 32.26,25.27 R6.2 | R13.2 16.51,28.07 v16.38,27.94 | v18.29,26.04 C13.+ | J10.2 38.61,25.37 | 38.61,25.37 42.21,25.37 42.49,25.09 42.49,24.04 42.62,23.91 43.58,23.91 44.83,22.66 44.83,19.81 | R4.2 28.19,23.37 27.81,23.75 v27.81,25.02 | U2.13 44.85,19.83 44.83,19.81
  Top 0.254: v43.56,19.94 43.17,20.33 J2.2 41.86,20.33 41.38,20.81 41.04,20.81 40.77,21.08 C12.1 | U6.5 16.7,24.32 17.15,24.77 C13.+ 19.46,24.77 20.6,25.91 v23.37,25.91 | J3.2 23.37,11.94 23.37,13.21 23.37,15.75 v23.37,17.02
  Bottom 0.152: v32.91,16.5 32.73,16.5 32.58,16.66 28.6,16.66 28.04,17.23 28.04,17.81 26.54,19.3 23.37,19.3 | v23.37,25.91 26.29,25.91 27.2,24.99 27.81,24.99 | 27.81,24.99 v33.05,24.99 | v16.38,27.94 v18.29,26.04 | U2.13 43.67,19.83 | v27.81,25.02 27.81,24.99
  Bottom 0.254: 43.67,19.83 v43.56,19.94 | v23.37,17.02 23.37,19.3 v23.37,25.91
  other vias: 45.6,19.83
3.3V1  (via drill 0.3)
  Top 0.152: C15.2 70.87,16.13 71.25,16.51 74.06,16.51 | U7.24 81.88,18.83 84.3,16.41 84.84,16.41 85.06,16.41 85.98,17.33 85.98,19.81 | D7.A 64.52,15.75 | D3.A 64.52,13.21 | 74.06,16.51 75.44,16.51 75.72,16.79 U7.14 75.72,17.93 76.84,19.05 76.84,21.2 78.52,22.89 79.43,22.89 79.72,23.17 U7.34 79.72,24.95 79.76,24.99 79.76,25.27 79.76,25.37 | 74.06,16.51 v74.05,16.5 | U7.44 74.72,24.86 74.58,24.99 v74.2,24.99 73.69,24.99 73.41,25.27 R18.2 | R16.2 57.66,28.07 v57.53,27.94 | v59.44,26.04 C10.+ | J23.2 79.76,25.37 | 79.76,25.37 83.36,25.37 83.64,25.09 83.64,24.04 83.77,23.91 84.73,23.91 85.98,22.66 85.98,19.81 | R24.2 69.34,23.37 68.96,23.75 v68.96,25.02 | U8.13 86,19.83 85.98,19.81
  Top 0.254: v84.71,19.94 84.32,20.33 J22.2 83.01,20.33 82.53,20.81 82.19,20.81 81.92,21.08 C6.1 | U5.5 57.85,24.32 58.3,24.77 C10.+ 60.61,24.77 61.75,25.91 v64.52,25.91 | J18.2 64.52,11.94 64.52,13.21 64.52,15.75 v64.52,17.02
  Bottom 0.152: v74.05,16.5 73.88,16.5 73.72,16.66 69.75,16.66 69.18,17.23 69.18,17.81 67.69,19.3 64.52,19.3 | v64.52,25.91 67.44,25.91 68.35,24.99 68.96,24.99 | 68.96,24.99 v74.2,24.99 | v57.53,27.94 v59.44,26.04 | U8.13 84.82,19.83 | v68.96,25.02 68.96,24.99
  Bottom 0.254: 84.82,19.83 v84.71,19.94 | v64.52,17.02 64.52,19.3 v64.52,25.91
  other vias: 86.75,19.83
3.3V2  (via drill 0.3)